# EAGLE board umodular_mix4 (EAGLE 7.2.0)
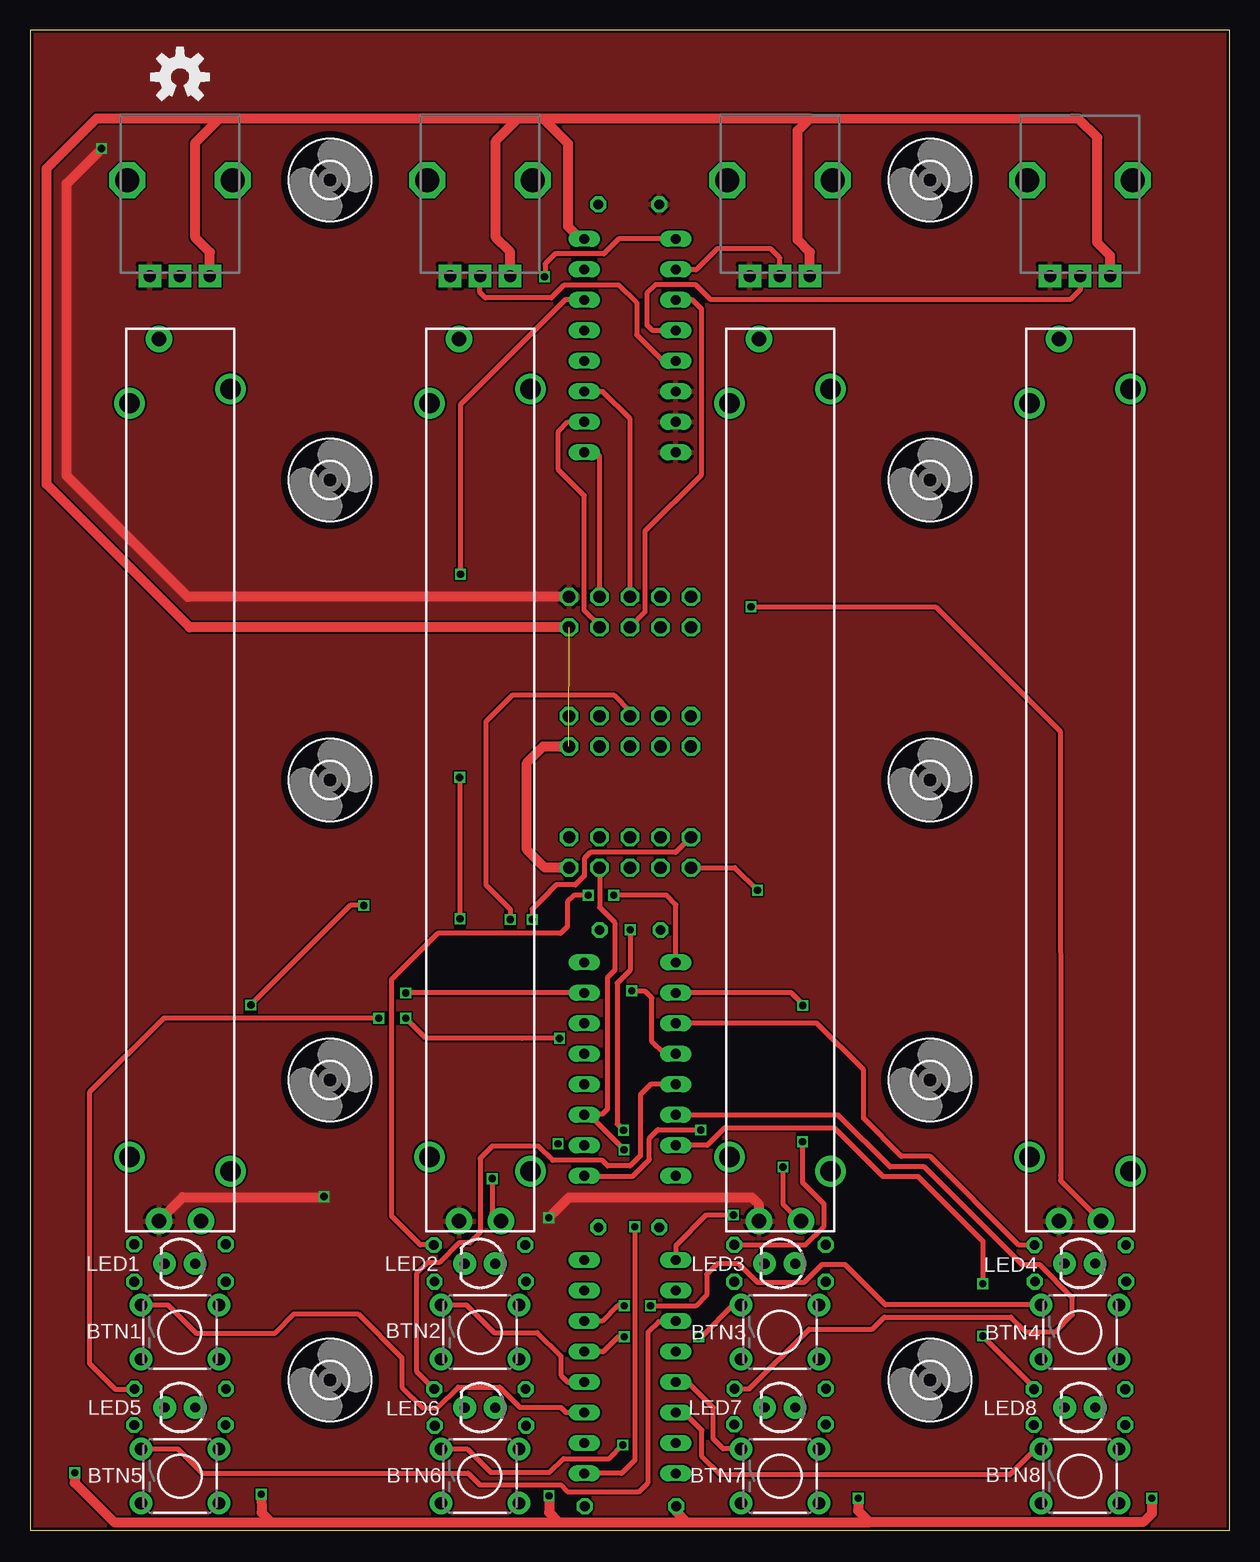
[diagram p0: board, top side]
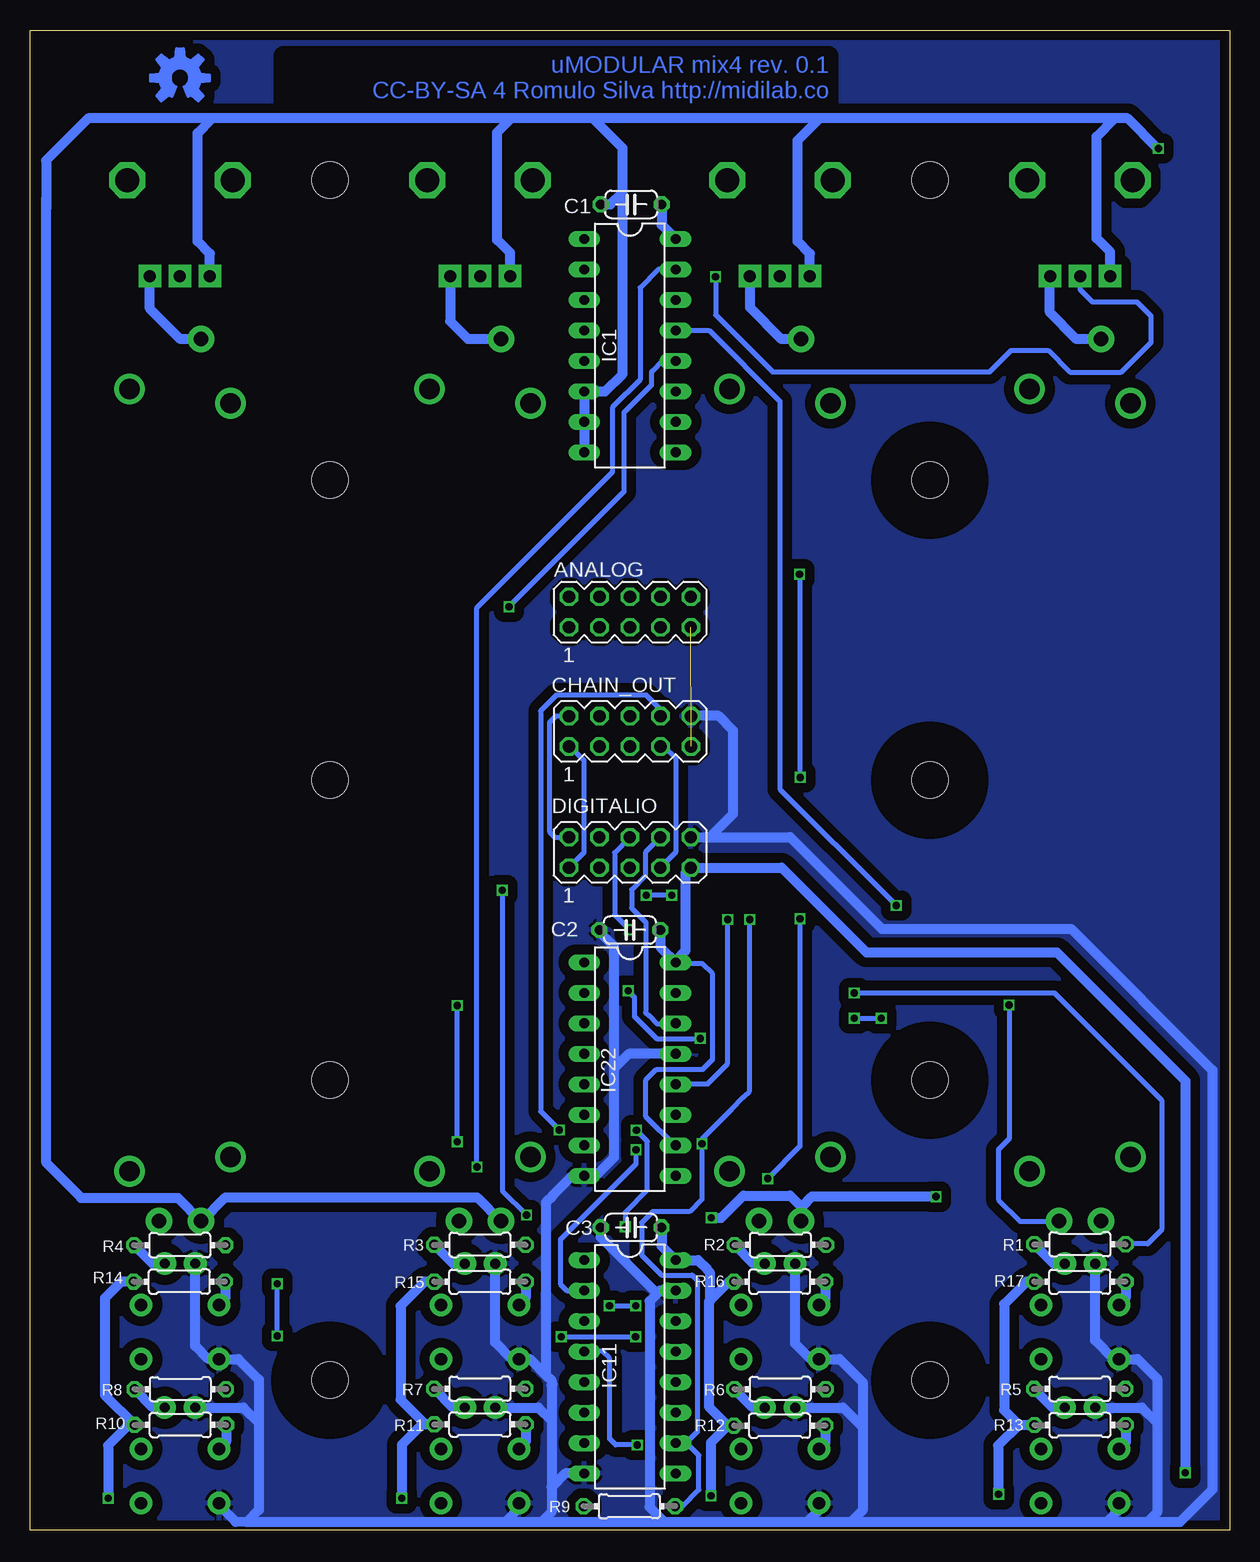
[diagram p1: board, bottom side, seen from below]

Size 100 x 125 mm. Coordinates in mm from the lower left corner, seen from the top.
Outline: 0,0 100,0 100,125 0,125 0,0
Copper layers (1*16): Top 0.035mm / dielectric 1.5mm / Bottom 0.035mm
Design rules "SeeedStudio_2layer_DRU_no_angle_20140221": minimum track width 6mil, minimum drill 12mil, track to track 6mil, track to pad 6mil, pad to pad 6mil, via to via 6mil, smd to smd 0mil, copper to edge 10mil, drill to drill 10mil, minimum pad ring 10mil, minimum via ring 6mil, stop-mask expansion 2mil, vias tented up to drill 100mil, thermal gap 10mil

## Footprints (pad centres in the part's own frame; a part is rotated, then mirrored left to right if it is on the bottom)
MA05-2 = drill 1.016 octagon: 1 -5.08,-1.27; 2 -5.08,1.27; 3 -2.54,-1.27; 4 -2.54,1.27; 5 0,-1.27; 6 0,1.27; 7 2.54,-1.27; 8 2.54,1.27; 9 5.08,-1.27; 10 5.08,1.27
TACTILE-PTH = drill 1.016 pad 1.88: 1 -3.251,2.261; 2 3.251,2.261; 3 -3.251,-2.261; 4 3.251,-2.261
C050-024X044 = drill 0.813 octagon: 1 -2.54,0; 2 2.54,0
SLIDER = drill 1.2 pad 2.184: 1 -36.75,1.75; 2 -36.75,-1.75; 3 36.75,1.75 | drill 1.7 pad 2.184: SUPPORT -32.6,-4.2; SUPPORT1 -31.4,4.2; SUPPORT2 31.4,4.2; SUPPORT3 32.6,-4.2
DIL16 = drill 0.813 long: 1 -8.89,-3.81; 2 -6.35,-3.81; 3 -3.81,-3.81; 4 -1.27,-3.81; 5 1.27,-3.81; 6 3.81,-3.81; 7 6.35,-3.81; 8 8.89,-3.81; 9 8.89,3.81; 10 6.35,3.81; 11 3.81,3.81; 12 1.27,3.81; 13 -1.27,3.81; 14 -3.81,3.81; 15 -6.35,3.81; 16 -8.89,3.81
LED_3MM = drill 0.813 pad 1.88: A -1.27,0; K 1.27,0
ALPS_POT = drill 1 pad 1.88 square: P$1 8,-2.5; P$2 8,0; P$3 8,2.5 | drill 2 octagon: P$4 0,-4.4; P$5 0,4.4
0204/7 = drill 0.813 octagon: 1 -3.81,0; 2 3.81,0
3,0 = hole 3: 0,0

## Placement (x,y rotation side)
ANALOG  [MA05-2]  50,76.5 0 bottom
BTN1  [TACTILE-PTH]  12.49,16.5 0 top
BTN2  [TACTILE-PTH]  37.5,16.5 0 top
BTN3  [TACTILE-PTH]  62.49,16.5 0 top
BTN4  [TACTILE-PTH]  87.5,16.5 0 top
BTN5  [TACTILE-PTH]  12.5,4.5 0 top
BTN6  [TACTILE-PTH]  37.49,4.5 0 top
BTN7  [TACTILE-PTH]  62.5,4.5 0 top
BTN8  [TACTILE-PTH]  87.5,4.5 0 top
C1  100 nF  [C050-024X044]  49.9,110.47 180 bottom
C2  100 nF  [C050-024X044]  50.01,50.01 0 bottom
C3  100 nF  [C050-024X044]  49.91,25.22 0 bottom
CHAIN_OUT  [MA05-2]  49.99,66.56 0 bottom
DIGITALIO  [MA05-2]  50.01,56.47 0 bottom
FADER_1  10kb  [SLIDER]  12.5,62.5 90 top
FADER_2  10kb  [SLIDER]  37.5,62.5 90 top
FADER_3  10kb  [SLIDER]  62.5,62.5 90 top
FADER_4  10kb  [SLIDER]  87.5,62.5 90 top
IC1  4051N  [DIL16]  50,98.7 270 bottom
IC11  74HC165N  [DIL16]  50,13.61 270 bottom
IC22  74HC595N  [DIL16]  50,38.41 270 bottom
LED1  [LED_3MM]  12.49,22.2 180 top
LED2  [LED_3MM]  37.5,22.2 180 top
LED3  [LED_3MM]  62.49,22.2 180 top
LED4  [LED_3MM]  87.5,22.2 180 top
LED5  [LED_3MM]  12.5,10.21 180 top
LED6  [LED_3MM]  37.5,10.2 180 top
LED7  [LED_3MM]  62.49,10.21 180 top
LED8  [LED_3MM]  87.5,10.21 180 top
POT_1  10kb  [ALPS_POT]  12.49,112.5 270 top
POT_2  10kb  [ALPS_POT]  37.5,112.5 270 top
POT_3  10kb  [ALPS_POT]  62.49,112.5 270 top
POT_4  10kb  [ALPS_POT]  87.5,112.5 270 top
R1  220  [0204/7]  12.5,23.82 180 bottom
R2  220  [0204/7]  37.46,23.76 180 bottom
R3  220  [0204/7]  62.5,23.77 180 bottom
R4  220  [0204/7]  87.52,23.75 180 bottom
R5  220  [0204/7]  12.52,11.77 180 bottom
R6  220  [0204/7]  37.49,11.74 180 bottom
R7  220  [0204/7]  62.52,11.78 180 bottom
R8  220  [0204/7]  87.47,11.73 180 bottom
R9  10k  [0204/7]  50.05,1.99 180 bottom
R10  10k  [0204/7]  87.47,8.77 0 bottom
R11  10k  [0204/7]  62.5,8.8 0 bottom
R12  10k  [0204/7]  37.53,8.7 0 bottom
R13  10k  [0204/7]  12.49,8.76 0 bottom
R14  10k  [0204/7]  87.55,20.7 0 bottom
R15  10k  [0204/7]  62.5,20.7 0 bottom
R16  10k  [0204/7]  37.52,20.7 0 bottom
R17  10k  [0204/7]  12.51,20.7 0 bottom
U$1  [3,0]  25,87.5 0 top
U$2  [3,0]  25,12.5 0 top
U$3  [3,0]  25,37.5 0 top
U$4  [3,0]  25,112.5 0 top
U$5  [3,0]  75,87.5 0 top
U$6  [3,0]  75,12.5 0 top
U$8  [3,0]  25,62.5 0 top
U$9  [OSHW-LOGO-M]  12.5,121.09 0 top
U$10  [OSHW-LOGO-M]  87.5,121.01 0 top
U$11  [3,0]  75,37.5 0 top
U$12  [3,0]  75,112.5 0 top
U$13  [3,0]  75,62.5 0 top

## Library data of the parts
ANALOG CHAIN_OUT DIGITALIO = con-lstb; OC_FARNELL: unknown; OC_NEWARK: unknown
BTN1-BTN8 POT_1-POT_4 = SparkFun-Electromechanical_mod
C1-C3 R1-R8 = rcl
FADER_1-FADER_4 = slider60mm
IC1 = 40xx
IC11 IC22 = 74xx-eu
LED1-LED8 = SparkFun-LED; PROD_ID: DIO-08794
R9-R17 = resistor
U$1-U$6 U$8 U$11-U$13 = holes
U$9 = SparkFun-Aesthetics
U$10 = SparkFun-Aesthetics3

## Nets
AGND: ANALOG.10 C1.2 FADER_1.1 FADER_2.1 FADER_3.1 FADER_4.1 IC1.6 IC1.7 IC1.8 POT_1.P$1 POT_2.P$1 POT_3.P$1 POT_4.P$1
GND: BTN1.3 BTN2.3 BTN3.3 BTN4.3 BTN5.3 BTN6.3 BTN7.3 BTN8.3 C2.1 C3.1 CHAIN_OUT.10 DIGITALIO.10 IC11.8 IC11.15 IC22.8 IC22.13 LED1.K LED2.K LED3.K LED4.K LED5.K LED6.K LED7.K LED8.K
MUX_COMM: ANALOG.5 IC1.3
MUX_CTR_A: ANALOG.6 IC1.11
MUX_CTR_B: ANALOG.7 IC1.10
MUX_CTR_C: ANALOG.8 IC1.9
N$2: BTN1.1 IC11.11 R17.2
N$3: BTN2.1 IC11.12 R16.2
N$4: BTN3.1 IC11.13 R15.2
N$5: BTN4.1 IC11.14 R14.2
N$6: BTN5.1 IC11.3 R13.2
N$7: BTN6.1 IC11.4 R12.2
N$8: BTN7.1 IC11.5 R11.2
N$9: BTN8.1 IC11.6 R10.2
N$75: IC22.7 R8.1
N$76: IC22.6 R7.1
N$77: IC22.5 R6.1
N$78: IC22.4 R5.1
N$79: IC22.3 R4.1
N$80: IC22.2 R3.1
N$81: IC22.1 R2.1
N$82: IC22.15 R1.1
N$83: LED1.A R1.2
N$84: LED2.A R2.2
N$85: LED4.A R4.2
N$86: LED3.A R3.2
N$87: LED5.A R5.2
N$88: LED6.A R6.2
N$89: LED7.A R7.2
N$90: LED8.A R8.2
N$274: FADER_1.2 IC1.13
N$275: FADER_2.2 IC1.14
N$276: FADER_3.2 IC1.15
N$277: FADER_4.2 IC1.12
N$278: IC1.1 POT_1.P$2
N$279: IC1.5 POT_2.P$2
N$280: IC1.2 POT_3.P$2
N$281: IC1.4 POT_4.P$2
SPI_CS1: CHAIN_OUT.1 DIGITALIO.1 IC11.1
SPI_CS2: CHAIN_OUT.2 DIGITALIO.2 IC22.12
SPI_MISO: DIGITALIO.6 IC11.9
SPI_MISO_CHAIN: CHAIN_OUT.6 IC11.10 R9.1
SPI_MOSI: DIGITALIO.8 IC22.14
SPI_MOSI_CHAIN: CHAIN_OUT.8 IC22.9
SPI_SCLK: CHAIN_OUT.7 DIGITALIO.7 IC11.2 IC22.11
VCC: ANALOG.9 C1.1 C2.2 C3.2 CHAIN_OUT.9 DIGITALIO.9 FADER_1.3 FADER_2.3 FADER_3.3 FADER_4.3 IC1.16 IC11.16 IC22.10 IC22.16 POT_1.P$3 POT_2.P$3 POT_3.P$3 POT_4.P$3 R9.2 R10.1 R11.1 R12.1 R13.1 R14.1 R15.1 R16.1 R17.1

## Tracks (layer width: path | path; a pad name or v marks a point on that pad's centre or on a via)
AGND  (via drill 0.6)
  Top 0.813: ANALOG.10 13.15,77.77 3.05,87.87 3.05,112.2 v5.97,115.12 v5.96,115.13 | FADER_3.1 60.72,25.78 60.72,27.16 60.18,27.7 44.91,27.7 v43.23,26.02 | FADER_1.1 10.75,25.78 12.72,27.75 24.46,27.75 v24.5,27.79
  Bottom 0.813: 9.6,117.64 8.52,117.64 6.01,115.13 v5.96,115.13 | 9.6,117.64 34.2,117.64 | 34.2,117.64 53.09,117.64 | 53.09,117.64 59.9,117.64 | 59.9,117.64 84.81,117.64 | 84.81,117.64 95.15,117.64 98.65,114.14 98.65,110.98 | 98.65,110.98 98.65,110.08 | 50.62,111.48 50.62,96.33 52.06,94.89 IC1.6 IC1.7 IC1.8 | 50.62,111.48 50.62,115.17 53.09,117.64 | C1.2 51.63,110.47 50.62,111.48 | POT_4.P$1 85,106.36 86.03,107.39 86.03,116.42 84.81,117.64 | POT_3.P$1 59.99,106.45 61.06,107.52 61.06,116.48 59.9,117.64 | POT_2.P$1 35,106.36 36.03,107.39 36.03,115.81 34.2,117.64 | POT_1.P$1 9.99,106.52 11.12,107.64 11.12,116.12 9.6,117.64 | 98.65,110.98 98.64,110.97 98.64,30.59 95.73,27.68 87.68,27.68 FADER_4.1 85.7,25.75 83.72,27.73 62.73,27.73 FADER_3.1 | v24.5,27.79 34.83,27.79 35.7,26.92 | 35.7,26.92 35.75,26.87 FADER_2.1 | v43.23,26.02 42.4,26.02 40.54,27.88 36.66,27.88 35.7,26.92
  pour Top: -0.05,125.05 100.38,125.05 100.38,-0.22 -0.05,-0.22 -0.05,124.43
GND
  Bottom 0.813: 6.88,0.67 4.17,0.67 1.47,3.37 1.47,38.33 13.23,50.09 29,50.09 36.65,57.74 DIGITALIO.10 43.35,57.74 41.4,59.69 41.4,66.63 42.61,67.84 CHAIN_OUT.10 | 6.88,0.67 10.26,0.67 | 10.26,0.67 31.59,0.67 | 31.59,0.67 35.28,0.67 | 35.28,0.67 47.11,0.67 | 47.11,0.67 57.38,0.67 | 57.38,0.67 60.38,0.67 | 60.38,0.67 81.95,0.67 | 81.95,0.67 82.87,0.69 84.24,2.06 BTN8.3 | BTN5.3 9.25,1.68 10.26,0.67 | BTN6.3 34.24,1.71 35.28,0.67 | BTN7.3 59.25,1.8 60.38,0.67 | 6.07,8.93 6.07,12.61 7.7,14.24 BTN1.3 9.68,14.24 11.24,15.8 11.24,22.18 LED1.K | 6.07,8.93 6.07,1.48 6.88,0.67 | 30.61,8.57 30.61,12.33 32.52,14.24 BTN2.3 34.94,14.24 36.24,15.54 LED2.K | 30.61,8.57 30.61,1.65 31.59,0.67 | 57,12.92 58.32,14.24 BTN3.3 59.84,14.24 61.24,15.64 61.24,22.18 LED3.K | 56.53,12.04 56.53,12.45 57,12.92 | 56.53,12.04 56.53,9.11 | 56.53,9.11 56.53,3.57 | 56.53,3.57 56.53,1.52 57.38,0.67 | 80.93,8.93 80.93,12.54 82.63,14.24 BTN4.3 85.14,14.24 86.24,15.34 LED4.K | 80.93,8.93 80.93,1.69 81.95,0.67 | LED5.K 7.34,10.21 6.07,8.93 | LED6.K 32.24,10.2 30.61,8.57 | LED7.K 57.62,10.21 56.53,9.11 | LED8.K 82.2,10.21 80.93,8.93 | IC11.15 47.48,19.95 47.73,19.7 | 47.73,19.7 48.35,19.08 48.35,1.91 47.11,0.67 | IC11.8 55.38,4.71 56.53,3.57 | 56.45,12.12 56.53,12.04 | C3.1 52.45,24.41 47.73,19.7 | C2.1 52.55,49.87 51.33,48.65 51.33,38.44 | 51.33,38.44 51.33,31.03 52.83,29.53 IC22.8 54.8,29.52 56.31,28.02 56.31,28.01 56.45,27.87 56.45,27.86 57,27.31 57,12.92 | IC22.13 50.09,39.69 51.33,38.44
  pour Bottom (isolate 0.813): -0.02,125.05 100.08,125.2 100.41,-0.2 -0.03,0 0.25,79.62
MUX_COMM
  Top 0.406: ANALOG.5 51.27,76.51 51.27,83.27 55.96,87.96 55.96,101.75 55.2,102.51 IC1.3
MUX_CTR_A
  Top 0.406: ANALOG.6 50,92.6 47.73,94.87 46.21,94.87 IC1.11
MUX_CTR_B
  Top 0.406: ANALOG.7 47.46,75.34 46.2,76.6 46.2,86.21 44.03,88.38 44.03,91.54 44.83,92.34 IC1.10
MUX_CTR_C
  Top 0.406: ANALOG.8 47.46,89.5 47.16,89.8 IC1.9
N$2
  Top 0.406: BTN1.1 11.5,18.76 13.85,16.41 20.42,16.41 22.02,18.01 27.35,18.01 30.99,14.37 30.99,11.92 32.72,10.19 33.94,10.19 35.67,11.92 39.14,11.92 40.83,10.23 44.24,10.23 44.66,9.81 46.17,9.81 IC11.11
  Bottom 0.813: R17.2 8.7,19.31 BTN1.1
N$3
  Top 0.406: BTN2.1 36.37,18.76 38.67,16.46 42.29,16.46 44.24,14.51 44.24,12.91 44.83,12.32 46.17,12.32 IC11.12
  Bottom 0.813: R16.2 33.71,19.3 BTN2.1
N$4  (via drill 0.6)
  Top 0.406: BTN3.1 58.61,18.76 55.98,16.13 55.81,16.2 v55.73,16.12 | v49.53,16.1 49.02,16.1 47.76,14.85 46.22,14.85 IC11.13
  Bottom 0.406: v55.73,16.12 v49.53,16.1
  Bottom 0.813: R15.2 58.69,19.31 BTN3.1
N$5  (via drill 0.6)
  Top 0.406: BTN4.1 71.28,18.76 67.92,22.12 65.99,22.12 64.49,20.62 60.63,20.62 59.05,22.2 57.27,22.2 56.38,21.31 56.38,19.59 55.46,18.67 51.73,18.67 v51.71,18.69 | v49.51,18.69 48.95,18.69 47.68,17.42 IC11.14
  Bottom 0.406: v51.71,18.69 v49.51,18.69
  Bottom 0.813: R14.2 83.74,19.26 BTN4.1
N$6
  Top 0.406: BTN5.1 12.32,6.76 14.34,4.74 36.51,4.74 37.48,3.77 44.23,3.77 44.79,3.21 50.78,3.21 51.52,3.95 51.52,16.51 52.38,17.37 53.77,17.37 IC11.3
  Bottom 0.813: R13.2 8.68,7.33 BTN5.1
N$7  (via drill 0.6)
  Top 0.406: BTN6.1 36.43,6.76 38.39,4.8 43.29,4.8 44.44,5.95 48.26,5.95 v49.4,7.09
  Bottom 0.406: v49.4,7.09 51.2,7.09 51.7,7.59 51.7,14.3 52.29,14.89 53.8,14.89 IC11.4
  Bottom 0.813: R12.2 33.72,7.28 BTN6.1
N$8
  Top 0.406: BTN7.1 57.77,6.76 56.94,7.59 56.94,10.21 54.9,12.25 53.9,12.25 IC11.5
  Bottom 0.813: R11.2 58.69,7.32 BTN7.1
N$9
  Top 0.406: BTN8.1 83.83,6.76 81.66,4.59 57.53,4.59 55.99,6.13 55.99,8.32 54.61,9.7 53.91,9.7 IC11.6
  Bottom 0.813: R10.2 83.66,7.35 BTN8.1
N$75  (via drill 0.6)
  Top 0.406: IC22.7 53.83,32.05 56.42,32.05 57.9,33.53 67.02,33.53 71.07,29.48 73.99,29.48 79.4,24.07 v79.4,20.53 | R8.1 83.66,11.91 v79.4,16.17
  Bottom 0.406: v79.4,16.17 v79.4,20.53
N$76
  Top 0.406: R7.1 59.95,11.78 64.92,16.75 70.19,16.75 71.19,17.75 81.73,17.75 82.96,16.52 85.46,16.52 86.87,17.93 86.87,19.37 84.15,22.09 82.69,22.09 74.51,30.27 71.68,30.27 67.37,34.58 53.84,34.58 IC22.6
N$77
  Top 0.406: IC22.5 51.73,37.15 50.86,36.28 50.86,31.19 50.02,30.35 48.14,30.35 47.69,30.8 43.56,30.8 42.36,32 38.52,32 37.5,30.98 37.5,24.77 36.66,23.93 35.74,23.93 34.09,22.28 33.13,22.28 32.19,21.34 32.19,13.23 R6.1
N$78  (via drill 0.6)
  Top 0.406: IC22.4 52.85,39.69 51.83,40.71 51.83,44.34 51.28,44.89 50.18,44.89 v50.14,44.93 | v44.13,40.97 40.99,40.97 40.97,40.99 32.98,40.99 v31.32,42.65 | v29.05,42.66 11.13,42.66 4.94,36.47 4.94,13.9 7.09,11.75 8.7,11.75 R5.1
  Bottom 0.406: v50.14,44.93 50.14,44.9 49.63,44.39 49.63,42.81 47.78,40.96 v44.14,40.96 v44.13,40.97 | v31.32,42.65 v29.06,42.65 v29.05,42.66
N$79
  Top 0.406: R4.1 82.42,23.75 75.01,31.15 72.61,31.15 69.46,34.3 69.46,38.35 65.56,42.25 53.84,42.25 IC22.3
N$80  (via drill 0.6)
  Top 0.406: R3.1 64.61,23.77 66.17,25.33 66.17,27.16 64.38,28.95 v64.38,32.37 | v64.4,43.71 64.4,43.81 63.42,44.79 53.84,44.79 IC22.2
  Bottom 0.406: v64.38,32.37 64.38,43.69 v64.4,43.71
N$81  (via drill 0.6)
  Top 0.406: R2.1 32.53,23.76 30.13,26.16 30.13,45.89 33.96,49.72 44.21,49.72 44.78,50.29 44.78,52.34 45.34,52.9 v46.51,52.9 | IC22.1 53.83,47.33 53.83,52.13 53.05,52.91 48.67,52.91 v48.65,52.89
  Bottom 0.406: v46.51,52.9 v48.65,52.89
N$82  (via drill 0.6)
  Top 0.406: IC22.15 v31.32,44.77 v31.31,44.76
  Bottom 0.406: v31.31,44.76 14.64,44.76 5.69,35.81 5.69,25.01 6.85,23.85 8.65,23.85 R1.1
N$83
  Bottom 0.813: LED1.A 14.7,22.2 R1.2
N$84
  Bottom 0.813: LED2.A 39.71,22.2 R2.2
N$85
  Bottom 0.813: LED4.A 89.78,22.2 R4.2
N$86
  Bottom 0.813: LED3.A 64.74,22.2 R3.2
N$87
  Bottom 0.813: LED5.A 14.77,10.21 R5.2
N$88
  Bottom 0.813: LED6.A 39.76,10.2 R6.2
N$89
  Bottom 0.813: LED7.A 64.75,10.21 R7.2
N$90
  Bottom 0.813: LED8.A 89.75,10.21 R8.2
N$274  (via drill 0.6)
  Top 0.406: v27.82,52.05 26.7,52.05 v18.41,43.76
  Bottom 0.406: IC1.13 43.4,99.97 37.5,94.07 37.5,61.74 28.45,52.69 28.45,52.68 v27.82,52.05 | v18.41,43.76 18.41,32.59 19.29,31.71 19.29,27.53 17.49,25.73 14.27,25.73 FADER_1.2
N$275  (via drill 0.6)
  Top 0.406: IC1.14 44.6,102.51 35.87,93.78 v35.87,79.64 | v35.8,62.72 35.8,50.96 v35.83,50.93 | v38.52,29.29 38.52,26.48 FADER_2.2
  Bottom 0.406: v35.87,79.64 35.87,62.79 v35.8,62.72 | v35.83,50.93 35.83,31.98 v38.52,29.29
N$276  (via drill 0.6)
  Top 0.406: FADER_3.2 64.14,25.75 62.75,27.14 v62.75,30.26
  Bottom 0.406: IC1.15 47.63,105.05 49.15,103.53 49.15,95.86 51.46,93.55 51.46,88.17 62.75,76.88 v62.75,30.26
N$277  (via drill 0.6)
  Top 0.406: v60.08,76.94 75.47,76.94 85.85,66.56 85.89,29.55 85.89,29.11 FADER_4.2
  Bottom 0.406: IC1.12 47.3,97.43 48.16,96.57 48.16,96.56 48.22,96.5 48.22,95.39 50.5,93.11 50.5,86.52 v60.08,76.94
N$278  (via drill 0.6)
  Top 0.406: IC1.1 49.08,107.59 47.83,106.34 43.75,106.34 42.92,105.51 42.92,104.5 v42.87,104.45
  Bottom 0.406: v42.87,104.45 42.87,101.27 38.12,96.52 20.02,96.52 18.23,98.31 15.16,98.31 13.34,96.49 9.04,96.49 6.56,98.97 6.56,101.16 7.73,102.33 11.45,102.33 12.47,103.35 12.47,104.48 POT_1.P$2
N$279
  Top 0.406: IC1.5 52.72,97.43 50.55,99.6 50.55,102.3 49.08,103.77 49.05,103.77 49.04,103.76 44.53,103.76 43.45,102.68 37.94,102.68 37.48,103.14 37.48,104.48 POT_2.P$2
N$280
  Top 0.406: POT_3.P$2 62.49,106.02 61.72,106.79 57.29,106.79 55.52,105.02 53.84,105.02 IC1.2
N$281
  Top 0.406: POT_4.P$2 87.5,103.35 86.68,102.53 56.74,102.53 55.52,103.75 55.51,103.75 55.47,103.79 52.14,103.79 51.41,103.06 51.41,100.44 51.87,99.98 IC1.4
SPI_CS1  (via drill 0.6)
  Top 0.406: DIGITALIO.1 58.74,55.2 v60.63,53.31 | IC11.1 53.82,23.71 56.37,26.26 v58.62,26.26
  Bottom 0.406: CHAIN_OUT.1 54.98,65.29 53.83,64.14 53.83,56.45 DIGITALIO.1 | v60.63,53.31 60.63,28.27 v58.62,26.26
SPI_CS2  (via drill 0.6)
  Top 0.406: DIGITALIO.2 53.81,56.47 46.69,56.47 46.2,55.98 46.2,54.51 45.45,53.76 43.85,53.76 43.27,53.18 43.27,53.17 41.85,51.75 v41.85,50.88
  Bottom 0.406: CHAIN_OUT.2 56.17,67.83 56.71,67.29 56.71,58.2 56.25,57.74 DIGITALIO.2 | IC22.12 46.16,37.17 43.55,37.17 41.85,38.87 v41.85,50.88
SPI_MISO  (via drill 0.6)
  Top 0.406: v50.4,25.27 50.4,5.82 49.3,4.72 IC11.9 | v50.01,50.02 50.01,46.67 48.92,45.58 48.92,33.85 v49.46,33.31
  Bottom 0.406: DIGITALIO.6 50.01,57.72 51.27,56.45 51.27,51.28 v50.01,50.02 | v50.4,25.27 50.4,26.48 48.54,28.34 48.54,32.39 v49.46,33.31
SPI_MISO_CHAIN  (via drill 0.6)
  Top 0.406: v40.02,50.88 40.04,50.9 40.04,51.72 37.99,53.77 37.99,67.37 40.18,69.56 48.71,69.56 49.99,68.28 CHAIN_OUT.6
  Bottom 0.305: 46.17,7.27 IC11.10
  Bottom 0.406: 45.31,7.27 44.39,8.19 44.39,20.82 44.82,21.25 47.36,21.25 49.02,22.91 49.02,25.62 48.1,26.54 45.02,26.54 44,27.56 v44,32.18 44,32.58 41.56,35.02 41.56,35.03 40.5,36.09 40.5,36.1 40.02,36.58 v40.02,50.88 | R9.1 45.62,1.99 44.26,3.34 44.26,6.22 45.31,7.27 | 46.17,7.27 45.31,7.27
SPI_MOSI
  Bottom 0.406: DIGITALIO.8 47.47,57.73 48.71,56.48 48.71,54.53 49.86,53.38 49.86,51.83 48.68,50.65 48.68,43.12 | 48.71,43.15 48.68,43.12 | IC22.14 46.2,42.21 47.77,42.21 48.45,42.89 48.68,43.12
SPI_MOSI_CHAIN  (via drill 0.6)
  Top 0.406: IC22.9 46.22,29.5 50.24,29.5 51.62,30.88 51.62,32.65 52.33,33.36 55.87,33.36 v55.89,33.34
  Bottom 0.406: CHAIN_OUT.8 47.45,68.41 48.63,69.58 56.14,69.58 57.45,68.27 57.45,34.9 v55.89,33.34
SPI_SCLK  (via drill 0.6)
  Top 0.406: IC22.11 | IC22.11 46.59,34.6 v49.5,31.69 | DIGITALIO.7 47.47,51.9 48.71,50.65 48.71,46.64 48.11,46.04 48.11,35.08 47.69,34.66 46.24,34.66 IC22.11
  Bottom 0.406: CHAIN_OUT.7 47.14,65.29 46.19,64.34 46.19,56.48 DIGITALIO.7 | v49.5,31.69 49.5,30.5 55.79,24.21 55.79,20.49 55.25,19.95 IC11.2
VCC  (via drill 0.6)  (1 unrouted)
  Top 0.813: v3.72,4.78 3.72,3.94 6.98,0.68 6.99,0.68 7,0.67 20.09,0.67 | 20.09,0.67 44.05,0.67 | 44.05,0.67 54.74,0.67 | 54.74,0.67 69.96,0.67 | ANALOG.9 13.31,75.23 1.39,87.15 1.39,113.48 5.55,117.64 15.8,117.64 | 15.8,117.64 40.7,117.64 | 40.7,117.64 42.73,117.64 | 42.73,117.64 65,117.64 | 65,117.64 87.37,117.63 | 87.37,117.63 86.83,117.65 | v19.28,2.98 19.3,1.46 20.09,0.67 | v43.25,2.86 43.25,1.47 44.05,0.67 | v69.01,2.65 69.01,1.62 69.96,0.67 | v93.48,2.65 93.48,1.38 92.77,0.67 69.96,0.67 | R9.2 53.85,1.55 54.74,0.67 | POT_1.P$3 14.99,106.5 13.79,107.7 13.79,115.63 15.8,117.64 | POT_2.P$3 40,106.52 38.82,107.7 38.82,115.76 40.7,117.64 | POT_4.P$3 90,106.21 88.94,107.27 88.94,116.06 87.37,117.63 | DIGITALIO.9 42.9,55.2 41.4,56.7 41.4,63.94 42.77,65.31 44.9,65.31 CHAIN_OUT.9 42.84,65.29 | IC1.16 45.86,107.59 44.84,108.61 44.84,115.53 42.73,117.64 | POT_3.P$3 65,106.5 63.97,107.52 63.97,116.61 65,117.64
  Bottom 0.406: IC22.10 46.28,32.06 48.67,34.45 48.67,37.52 47.79,38.4 43.95,38.4 43.12,39.23 43.12,46.34 43.99,47.21 46.09,47.21 IC22.16
  Bottom 0.813: v3.72,4.78 3.72,37.43 14.43,48.14 30.3,48.14 37.36,55.2 DIGITALIO.9 45.35,54.77 45.35,48.3 46.19,47.46 IC22.16 47.47,48.58 C2.2 | R13.1 17.57,8.76 | 17.57,8.76 17.61,8.76 19.32,7.05 19.32,3.44 v19.28,2.98 | R12.1 41.84,8.7 | 41.84,8.7 43.25,7.29 v43.25,2.86 | R11.1 67.06,8.8 | 67.06,8.8 67.31,8.8 69.01,7.11 v69.01,2.65 | v93.48,2.65 93.49,2.91 93.49,7.05 91.78,8.77 R10.1 93.76,11.25 93.76,19.33 92.39,20.7 R14.1 | R15.1 67.11,20.7 69.12,18.68 69.12,10.87 67.06,8.8 | R16.1 41.76,20.7 43.42,19.04 43.42,18.94 | 43.42,18.94 43.42,10.28 41.84,8.7 | R17.1 16.93,20.7 18.81,18.82 18.81,9.99 17.57,8.76 | 43.42,18.94 43.36,19 43.36,21.5 43.53,21.67 43.53,21.68 44.34,22.5 IC11.16 47.37,23.67 C3.2 | C1.1 47.36,108.76 IC1.16 | FADER_1.3 12.79,99.25 15.01,101.47 15.01,104.49 POT_1.P$3 | FADER_2.3 37.38,99.25 39.99,101.86 POT_2.P$3 | FADER_4.3 87.46,99.25 90,101.79 POT_4.P$3 | FADER_3.3 63.49,99.25 65,100.75 POT_3.P$3

## Text on the board
Bottom: uMODULAR mix4 rev. 0.1 / CC-BY-SA 4 Romulo Silva http://midilab.co
tValues: uMODULAR mix4 rev. 0.1 / CC-BY-SA 4 Romulo Silva http://midilab.co | 10kb | 10kb | 10kb | 10kb | ANALOG_5 | ANALOG_6 | ANALOG_7 | ANALOG_8 | 10kb | 10kb | 10kb | 10kb | ANALOG_1 | ANALOG_2 | ANALOG_3 | ANALOG_4